# Altium PCB switch_rx.PcbDoc
Units mm, origin at the board's own origin, x right, y up, seen from the top; angles counter-clockwise.
Board outline 66.04 x 59.88 mm, 2 copper layers (Top Layer, Bottom Layer); 58 components, 43 nets, 195 pads, 0 vias.
Unrouted connection lines stored in the file: 13.
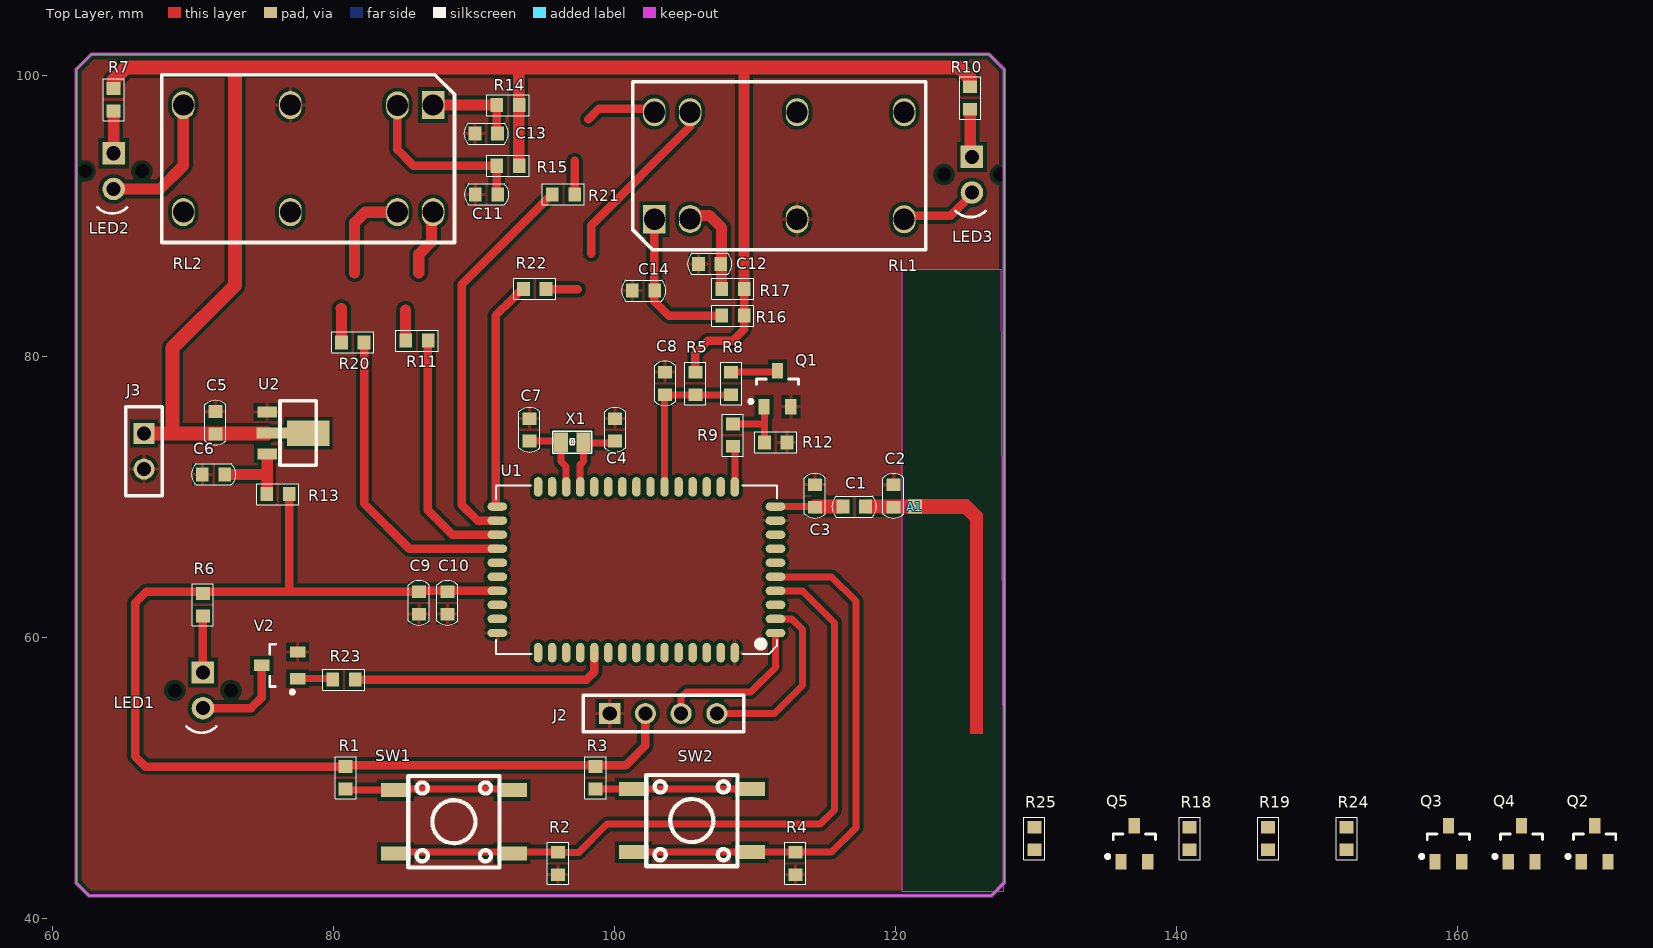
[diagram p0: Top Layer view]
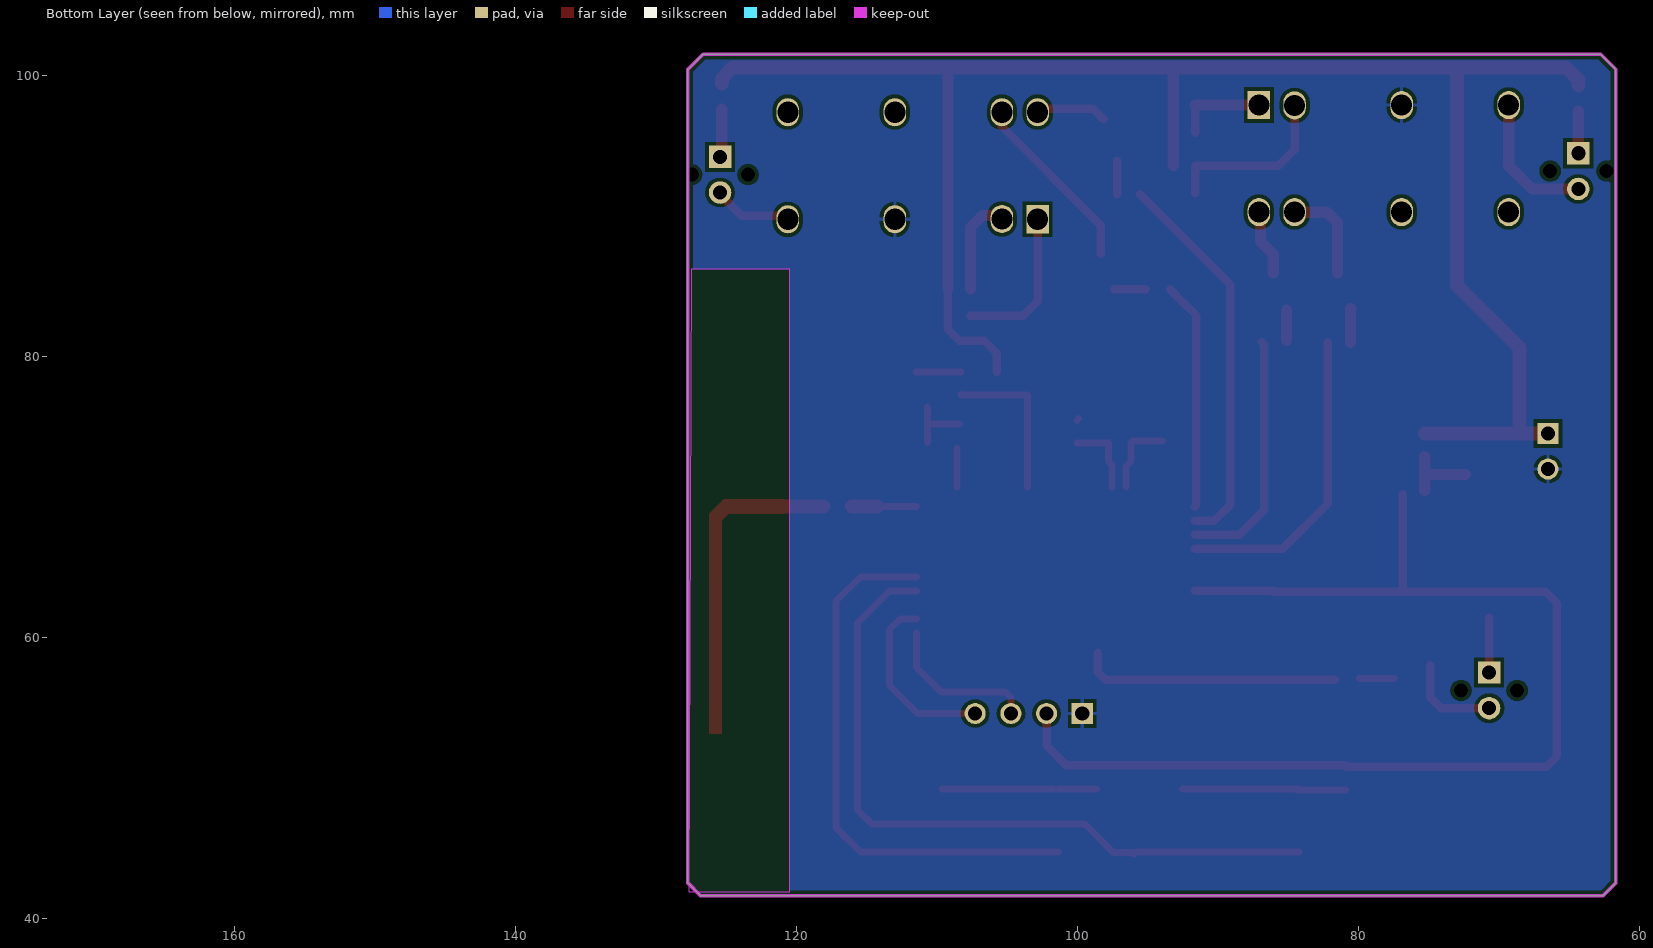
[diagram p1: Bottom Layer view, seen from below]

## Layer stack, top to bottom
Top Solder: solder mask 0.0102, Solder Resist, Dk 3.5
Top Layer: signal copper 0.0356
Dielectric 1: dielectric 0.32, FR-4, Dk 4.8
Bottom Layer: signal copper 0.0356
Bottom Solder: solder mask 0.0102, Solder Resist, Dk 3.5

## Board outline
61.722,42.545 62.611,41.656 126.873,41.656 127.762,42.545 127.762,100.457 126.682,101.536 62.801,101.536 61.722,100.457

## Design rules (kind name [scope] priority, off if disabled: settings)
Clearance [All] p1: gap=0.254
PlaneConnect [All] p1: planeconnectstyle=Direct reliefexpansion=0.508 reliefentries=4 reliefconductorwidth=0.254 reliefairgap=0.254
PolygonConnect PolygonConnect_1 [All vs IsVia] p1: connectstyle=Direct reliefconductorwidth=0.254 reliefentries=4 polygonreliefangle="90 Angle" airgapwidth=0.254
PolygonConnect [All] p2: connectstyle=Relief reliefconductorwidth=0.254 reliefentries=4 polygonreliefangle="90 Angle" airgapwidth=0.254
RoutingVias [All] p1: holewidth=0.711 width=1.27 viastyle="Through Hole" minholewidth=0.711 minwidth=1.27 maxholewidth=0.711 maxwidth=1.27
SolderMaskExpansion [All] p1: expansion=0.102
Width [All] p1: maxlimit=2 minlimit=0.254 preferedwidth=0.254
29 further rules are at their usual default settings.

## Components (designator, comment, footprint, x,y, rotation, side; value= is the part's Value field where it differs from the comment)
A1 "ANTENNA" AN2 121.412,69.342 r0 top
C1 "CAP" cap0603(1608) 117.094,69.342 r180 top
C2 "CAP" cap0603(1608) 119.888,70.104 r270 top
C3 "CAP" cap0603(1608) 114.3,70.104 r90 top
C4 "CAP" cap0603(1608) 100.076,74.803 r270 top
C5 "CC103" cap0603(1608) 71.628,75.311 r90 top
C6 "CC103" cap0603(1608) 71.501,71.628 r180 top
C7 "CAP" cap0603(1608) 93.98,74.803 r270 top
C8 "CAP" cap0603(1608) 103.632,78.105 r270 top
C9 "CC103" cap0603(1608) 86.106,62.484 r270 top
C10 "CC103" cap0603(1608) 88.138,62.484 r270 top
C11 "CC103" cap0603(1608) 90.932,91.567 r180 top
C12 "CC103" cap0603(1608) 106.807,86.614 r180 top
C13 "CC103" cap0603(1608) 90.901,95.885 r180 top
C14 "CC103" cap0603(1608) 102.108,84.709 r180 top
J2 "HEAD-1x4" HEAD-1x4-2.54 99.695,54.61 r0 top
J3 "BAT" HEAD-1x2-2.54 66.548,74.549 r270 top
LED1 "LED" led_3mm 70.739,56.261 r270 top
LED2 "LED" led_3mm 64.389,93.218 r270 top
LED3 "LED" led_3mm 125.476,92.964 r270 top
Q1 "BSH103" SOT-23-mosfet 111.633,77.724 r0 top
Q2 "BSH103" SOT-23-mosfet 169.799,45.339 r0 top
Q3 "BSH103" SOT-23-mosfet 159.385,45.339 r0 top
Q4 "BSH103" SOT-23-mosfet 164.592,45.339 r0 top
Q5 "BSH103" SOT-23-mosfet 137.033,45.339 r0 top
R1 "10K" RESC0603(1608)_N 80.899,50.038 r90 top
R2 "100K" RESC0603(1608)_N 96.012,43.942 r90 top
R3 "10K" RESC0603(1608)_N 98.679,50.038 r90 top
R4 "100K" RESC0603(1608)_N 112.903,43.942 r270 top
R5 "47K_1%" RESC0603(1608)_N 105.791,78.105 r270 top
R6 "4.7K" RESC0603(1608)_N 70.739,62.357 r90 top
R7 "4.7K" RESC0603(1608)_N 64.389,98.298 r90 top
R8 "22K_1%" RESC0603(1608)_N 108.331,78.105 r270 top
R9 "1K" RESC0603(1608)_N 108.458,74.422 r270 top
R10 "4.7K" RESC0603(1608)_N 125.349,98.425 r90 top
R11 "10K" RESC0603(1608)_N 85.979,81.153 r180 top
R12 "100K" RESC0603(1608)_N 111.506,73.914 r180 top
R13 "0" RESC0603(1608)_N 76.073,70.231 r180 top
R14 "1" RESC0603(1608)_N 92.456,97.917 r0 top
R15 "1" RESC0603(1608)_N 92.456,93.599 r0 top
R16 "1" RESC0603(1608)_N 108.458,82.931 r0 top
R17 "1" RESC0603(1608)_N 108.458,84.836 r0 top
R18 "100K" RESC0603(1608)_N 140.97,45.72 r90 top
R19 "100K" RESC0603(1608)_N 146.558,45.72 r90 top
R20 "10K" RESC0603(1608)_N 81.407,81.026 r180 top
R21 "10K" RESC0603(1608)_N 96.393,91.567 r0 top
R22 "10K" RESC0603(1608)_N 94.361,84.836 r0 top
R23 "10K" RESC0603(1608)_N 80.772,57.023 r180 top
R24 "100K" RESC0603(1608)_N 152.146,45.72 r90 top
R25 "100K" RESC0603(1608)_N 129.921,45.72 r90 top
RL1 "HFE60P/5-2HSTG-L2" HFE60 102.87,89.789 r0 top
RL2 "HFE60P/5-2HSTG-L2" HFE60 87.122,97.917 r180 top
SW1 "TACT" SW_6X6X5mm 88.6,46.911 r180 top
SW2 "TACT" SW_6X6X5mm 105.537,46.99 r180 top
U1 "MO100F7, nRF52840 module, YuLiWuLi" MO100F7 91.694,69.342 r270 top locked
U2 "HT7333" HT7333-SOT-89 75.311,76.073 r270 top
V2 "NPN" SOT-23-NPN 76.2,58.039 r90 top
X1 "32.768KHz" 32.768_A 97.028,73.914 r0 top

## Footprints (in the part's own frame and the unit in brackets; to place one, negate y for a bottom-side part, rotate by r counter-clockwise, add the part's x,y. Pads: shape width x height; smd on the part's side, far side on the other; paste and mask are expansions set on the pad)
32.768_A [mm]
  rect 1x1.4 smd mask+0.05: 1(-0.8,0) 2(0.8,0)
  silkscreen extent -1.4,-0.79 1.4,0.79, body extent -1.1,-0.67 1.1,0.68, height 0.7
AN2 [mm]
  rect 1x1 smd: 1(0,0)
  Top Layer region: -0.534,0.522 -0.534,-0.524 3.819,-0.524 3.819,0.522
  Top Layer region: 3.937,-16.202 4.842,-16.202 4.842,-0.501 3.937,-0.501
  Top Layer region: 3.109,-0.188 4.132,-1.211 4.842,-0.501 3.819,0.522
cap0603(1608) [mm] "Chip capcitance, Body 1.6x0.8mm, IPC Medium Density"
  rect 0.9x1 smd: 1(-0.8,0) 2(0.8,0)
  silkscreen extent -1.58,-0.75 1.58,0.75, body extent -0.85,-0.47 0.85,0.47, height 0.6
HEAD-1x2-2.54 [mm]
  rect 1.5x1.5 hole 1: 1(0,0)
  round 1.5 hole 1: 2(2.54,0)
  silkscreen extent -1.9,-1.3 4.44,1.3
HEAD-1x4-2.54 [mm]
  rect 1.5x1.5 hole 1: 1(0,0)
  round 1.5 hole 1: 2(2.54,0) 3(5.08,0) 4(7.62,0)
  silkscreen extent -1.9,-1.3 9.53,1.3
HFE60 [mm]
  rect 1.6x2 hole 1.5: 1(0,0)
  oval 1.6x2 hole 1.5: 2(0,7.62) 3(2.54,0.02) 4(2.54,7.62) 5(10.16,0) 6(17.78,0) 7(10.16,7.62) 8(17.78,7.62)
  silkscreen extent -1.52,-2.16 19.3,9.78
HT7333-SOT-89 [mil]
  rect 30x54 smd: 1(0,0) 3(118,0)
  rect 30x86.61 smd: 2(59,12.76)
  rect 72x118.11 smd: 2(60,115)
  silkscreen extent -32,36 150,138
led_3mm [mm] "LED_3MM"
  rect 1.6x1.6 / inner round 1.524 / far side rect 1.6x1.6 hole 1: 1(-1.27,0)
  round 1.6 / inner round 1.524 / far side round 1.6 hole 1: 2(1.27,0)
  round 0.1 / inner round 1.524 / far side round 0.1 hole 1 unplated: " "(0,2) " "(0,-2)
  silkscreen extent 2.58,-1.17 3.02,0.95, body extent -2.51,-2.51 2.51,2.51, height 3.81
MO100F7 [mm]
  oval 0.6x1.4 smd mask+0.06: 1(0,0) 2(1,0) 3(2,0) 4(3,0) 5(4,0) 6(5,0) 7(6,0) 8(7,0) 9(8,0) 10(9,0) 26(9,19.8) 27(8,19.8) 28(7,19.8) 29(6,19.8) 30(5,19.8) 31(4,19.8) 32(3,19.8) 33(2,19.8) 34(1,19.8) 35(0,19.8)
  oval 1.4x0.6 smd mask+0.06: 11(10.4,2.9) 12(10.4,3.9) 13(10.4,4.9) 14(10.4,5.9) 15(10.4,6.9) 16(10.4,7.9) 17(10.4,8.9) 18(10.4,9.9) 19(10.4,10.9) 20(10.4,11.9) 21(10.4,12.9) 22(10.4,13.9) 23(10.4,14.9) 24(10.4,15.9) 25(10.4,16.9) 36(-1.4,16.9) 37(-1.4,15.9) 38(-1.4,14.9) 39(-1.4,13.9) 40(-1.4,12.9) 41(-1.4,11.9) 42(-1.4,10.9) 43(-1.4,9.9) 44(-1.4,8.9) 45(-1.4,7.9) 46(-1.4,6.9) 47(-1.4,5.9) 48(-1.4,4.9) 49(-1.4,3.9) 50(-1.4,2.9)
  silkscreen extent -1.5,-0.1 10.5,19.9, body extent -1.52,-0.13 10.54,19.94, height 2.05
RESC0603(1608)_N [mm] "Chip Resistor, Body 1.6x0.8mm, IPC Medium Density"
  rect 0.9x1 smd: 1(-0.8,0) 2(0.8,0)
  silkscreen extent -1.5,-0.75 1.5,0.75, body extent -0.85,-0.47 0.85,0.47, height 0.6
SOT-23-mosfet [mm] "SOT-23, 3-Leads, Body 3,0x2,6mm (max), Pitch 0,95mm, IPC Medium Density"
  rect 0.8x1.1 smd: D(0,1.275) G(-0.95,-1.275) S(0.95,-1.275)
  silkscreen extent -2.02,-1.02 1.5,0.7, body extent -1.45,-1.21 1.45,1.21, height 0.98
SOT-23-NPN [mm]
  rect 0.8x1.1 smd: B(-0.95,-1.275) C(0,1.275) E(0.95,-1.275)
  silkscreen extent -2.03,-1.03 1.5,0.7, body extent -1.45,-1.21 1.45,1.21, height 0.98
SW_6X6X5mm [mm]
  rect 2.1x1 smd: 1(-4.15,2.25) 1(4.15,2.25) 2(-4.15,-2.25) 2(4.15,-2.25)
  silkscreen extent -3.25,-3.25 3.25,3.25, body extent -4.5,-3 4.5,3, height 5

## Part data
A1: "PCB Antenna"
J3: library part HEAD-1x2
Q1 Q2 Q3 Q4 Q5: library part MOSFET-N, "N channel MOSFET, 20V, 3.7A, 39mohm"
SW1 SW2: library part SWITCH_TACT_SPST_2-2_PINS
U1: library part MO100F7
X1: library part Crystal_2PIN

## Nets (pads, with @x,y where several pads share a name; then routed paths per layer and width w, separated by ;. In a path a pad name is that pad's centre, name@x,y a point inside that pad or via, vN(x,y) a via of type N, cw(c..) or ccw(c..) an arc to the next point about the centre after c; other vN are vias at no path point)
ACT_1: R11.1 U1.3 | length 17.7
  Top Layer w0.6: R11.1@86.906,81.026 86.741,80.861 86.741,69.088 88.487,67.342 U1.3
ACT_2: R21.1 U1.2 | length 27.8
  Top Layer w0.6: U1.2 90.281,68.342 89.154,69.469 89.154,85.128 R21.1
BAT+: C5.1 J3.1 R5.1 R7.2 R10.2 R14.2 R15.2 R16.2 R17.2 U2.2 | length 130.2
  Top Layer w0.6: R5.1 105.791,80.264 106.68,81.153 108.458,81.153 109.258,81.953 R16.2 R17.2
  Top Layer w0.8: R15.2@93.218,93.637 93.218,100.584 ; R17.2 109.258,100.546 109.309,100.546
  Top Layer w1: R7.2@64.389,99.314 64.389,99.695 65.278,100.584 73.025,100.584 ; J3.1 68.58,74.549 ; U2.2@75.311,74.549 68.58,74.549 ; R10.2@125.349,99.441 125.349,99.822 124.587,100.584 93.218,100.584 73.025,100.584 ; 68.58,74.549 68.58,80.645 73.025,85.09 73.025,100.584
BAT_DET: C8.2 R5.2 R8.2 U1.41 | length 11.3
  Top Layer w0.5: U1.41 103.594,77.267 108.293,77.267 R8.2
BAT_DET_EN: R9.2 U1.36 | length 2.7
  Top Layer w0.5: U1.36 R9.2@108.594,73.486
D+: U1.13
D-: U1.12
GND: C2.1 C3.2 C4.1 C5.2 C6.2 C7.1 C8.1 C9.2 C10.2 C11.2 C12.2 C13.2 C14.2 J2.1 J3.2 Q1.S Q2.S Q3.S Q4.S R2.1 R4.2 R12.1 R18.1 R19.1 R24.1 RL1.5 RL2.5 U1.10 U1.25 U1.34 U2.1 V2.E | length 0.2
  Top Layer w0.5: C4.1@99.949,75.603 C4.1@100.076,75.476
KEY_1: R2.2 SW1.1 U1.29 | length 51.3
  Top Layer w0.5: SW1.1@84.242,44.74 95.887,44.74 96.012,44.615 96.101,44.704 97.46,44.704 99.492,46.736 114.681,46.736 115.691,47.746 115.691,61.058 113.407,63.342 U1.29
KEY_2: R4.1 SW2.1 U1.30 | length 39.1
  Top Layer w0.5: SW2.1@101.387,44.74 109.687,44.74 112.901,44.74 R4.1 115.481,44.742 117.221,46.482 117.221,62.611 115.49,64.342 U1.30
LED_1: R23.1 U1.15 | length 18.5
  Top Layer w0.6: R23.1@81.699,57.023 98.044,57.023 98.594,57.573 U1.15
NetA1_1: A1.1 C1.1 C2.2 | length 3.3
  Top Layer w1: C1.1@118.11,69.342 A1.1
NetC1_2: C1.2 C3.1 U1.35 | length 4.6
  Top Layer w0.5: U1.35 C3.1@114.3,69.342
  Top Layer w1: C3.1@114.3,69.342 C1.2@116.078,69.342
NetC4_2: C4.2 U1.47 X1.2 | length 5.5
  Top Layer w0.5: U1.47 97.594,72.321 97.828,72.555 X1.2 ; X1.2@97.866,73.876 C4.2@100.076,73.876
NetC6_1: C6.1 R13.2 U2.3 | length 5.3
  Top Layer w0.8: C6.1@72.428,71.628 75.311,71.628 ; R13.2@75.311,70.485 75.311,71.628 ; U2.3@75.311,72.898 75.311,71.628
NetC7_2: C7.2 U1.48 X1.1 | length 5.5
  Top Layer w0.5: C7.2 X1.1@96.139,74.003 ; X1.1 96.228,72.555 96.594,72.189 U1.48
NetC11_1: C11.1 R15.1 RL2.3 | length 12.7
  Top Layer w0.6: RL2.3 84.582,94.742 85.725,93.599 R15.1 C11.1@91.656,91.643
NetC12_1: C12.1 R17.1 RL1.3 | length 7
  Top Layer w0.8: RL1.3@105.41,90.063 106.787,90.063 107.658,89.192 R17.1
NetC13_1: C13.1 R14.1 RL2.1 | length 6.5
  Top Layer w0.6: C13.1@91.656,95.93 R14.1
  Top Layer w0.8: RL2.1 R14.1
NetC14_1: C14.1 R16.1 RL1.1 | length 11.3
  Top Layer w0.6: RL1.1@102.87,90.043 102.87,83.947 103.886,82.931 R16.1
NetJ2_3: J2.3 U1.26 | length 11.2
  Top Layer w0.5: J2.3 104.775,55.753 105.156,56.134 109.728,56.134 111.494,57.9 U1.26
NetJ2_4: J2.4 U1.27 | length 13.1
  Top Layer w0.5: J2.4 111.414,54.61 113.411,56.607 113.411,60.579 112.648,61.342 U1.27
NetLED1_1: LED1.1 R6.1 | length 3.9
  Top Layer w0.6: LED1.1 R6.1@70.739,61.43
NetLED1_2: LED1.2 V2.C | length 6.8
  Top Layer w0.6: LED1.2 74.168,54.991 74.925,55.748 V2.C
NetLED2_1: LED2.1 R7.1 | length 2.9
  Top Layer w0.8: LED2.1@64.389,94.615 R7.1
NetLED2_2: LED2.2 RL2.6 | length 10.1
  Top Layer w0.8: LED2.2@64.262,91.948 LED2.2 67.691,91.948 69.342,93.599 RL2.6
NetLED3_1: LED3.1 R10.1 | length 3.6
  Top Layer w0.8: LED3.1@125.222,94.107 125.349,94.234 R10.1
NetLED3_2: LED3.2 RL1.6 | length 5.5
  Top Layer w0.6: RL1.6@120.65,90.043 123.952,90.043 LED3.2@125.476,91.567
NetQ1_D: RL2.4 | length 6.9
  Top Layer w0.8: 81.534,85.984 81.534,89.535 82.296,90.297 RL2.4
NetQ1_G: R18.2 R20.2 | length 2.4
  Top Layer w0.8: 80.584,83.434 80.607,83.411 R20.2
NetQ2_D: Q2.D RL1.4 | length 13.2
  Top Layer w0.6: 98.383,87.344 98.383,89.366 105.41,96.393 RL1.4@105.41,97.663
NetQ2_G: Q2.G R22.2 R24.2 | length 2.3
  Top Layer w0.6: R22.2@95.161,84.799 97.428,84.799
NetQ3_D: Q3.D RL2.2 | length 4.8
  Top Layer w0.8: 86.106,85.984 86.106,87.298 87.004,88.196 RL2.2@87.004,90.424
NetQ3_G: Q3.G R11.2 | length 2.1
  Top Layer w0.8: R11.2@85.156,81.176 85.156,83.307
NetQ4_G: Q4.G R19.2 R21.2 | length 2.4
  Top Layer w0.6: R21.2 97.193,93.947
NetQ5_D: Q1.D R8.1 | length 3.2
  Top Layer w0.5: R8.1 Q1.D@111.539,78.905
NetQ5_G: Q1.G R9.1 R12.2 | length 4.7
  Top Layer w0.5: R9.1 110.668,75.222 ; R12.2 Q1.G@110.706,76.426
NetR1_1: R1.1 SW1.2 | length 11.8
  Top Layer w0.5: R1.1@80.976,49.161 SW1.2@84.45,49.161 ; SW1.2@84.242,49.24 SW1.2@92.542,49.24
NetR3_1: R3.1 SW2.2 | length 10.7
  Top Layer w0.5: R3.1 101.385,49.238 SW2.2@101.387,49.24 ; SW2.2@101.727,49.24 SW2.2@109.687,49.24
NetR23_2: R23.2 V2.B | length 2.5
  Top Layer w0.5: V2.B R23.2@79.987,57.089
RST_1: R20.1 U1.4 | length 22.3
  Top Layer w0.6: R20.1 82.207,69.558 85.423,66.342 U1.4
RST_2: R22.1 U1.1 | length 16.3
  Top Layer w0.6: U1.1 91.567,69.469 91.567,82.931 91.932,83.296 ; 91.933,83.296 92.404,83.767 ; 92.404,83.768 R22.1@93.435,84.799
VDD: C9.1 C10.1 J2.2 R1.2 R3.2 R6.2 R13.1 U1.7 | length 83.5
  Top Layer w0.6: 76.873,63.322 R13.1 ; C9.1 66.713,63.284 65.913,62.484 65.913,51.562 66.637,50.838 R1.2 80.988,50.927 100.838,50.927 102.235,52.324 J2.2 ; C9.1@86.106,63.342 U1.7
pads on no net: "LED1. " "LED2. " "LED3. " Q4.D Q5.D Q5.G Q5.S R25.1 R25.2 RL1.2 RL1.7 RL1.8 RL2.7 RL2.8 U1.5 U1.6 U1.8 U1.9 U1.11 U1.14 U1.16 U1.17 U1.18 U1.19 U1.20 U1.21 U1.22 U1.23 U1.24 U1.28 U1.31 U1.32 U1.33 U1.37 U1.38 U1.39 U1.40 U1.42 U1.43 U1.44 U1.45 U1.46 U1.49 U1.50
copper on no net: | length 5
  Top Layer w0.6: 98.171,96.906 98.928,97.663 102.87,97.663

## Polygon pours and split planes (outlines as drawn)
GND on Bottom Layer "Top Layer-No Net" (solid, pour order 2): 61.722,88.519 61.722,42.926 62.992,41.656 126.746,41.656 127.762,42.672 127.762,88.519 127.635,88.646 127.762,100.521 126.746,101.536 114.745,101.536 74.739,101.536 62.738,101.537 61.722,100.521
GND on Top Layer "Top Layer-No Net" (solid, pour order 4): 63.039,41.609 61.849,42.799 61.849,100.076 61.595,100.33 62.801,101.536 126.682,101.536 127,101.219 127.508,100.711 127.508,43.148 126.476,41.858

## Keep-outs
Keep-Out Layer:
  pour cut-out: 120.523,86.233 126.682,86.233 127.508,86.233 127.701,41.91 120.523,41.91
  lines w0.254: 61.722,42.545 61.722,100.457 62.801,101.536 126.682,101.536 127.762,100.457 127.762,42.545 126.873,41.656 62.611,41.656 61.722,42.545